# EAGLE board rgb_led_watch (EAGLE 6.5.0)
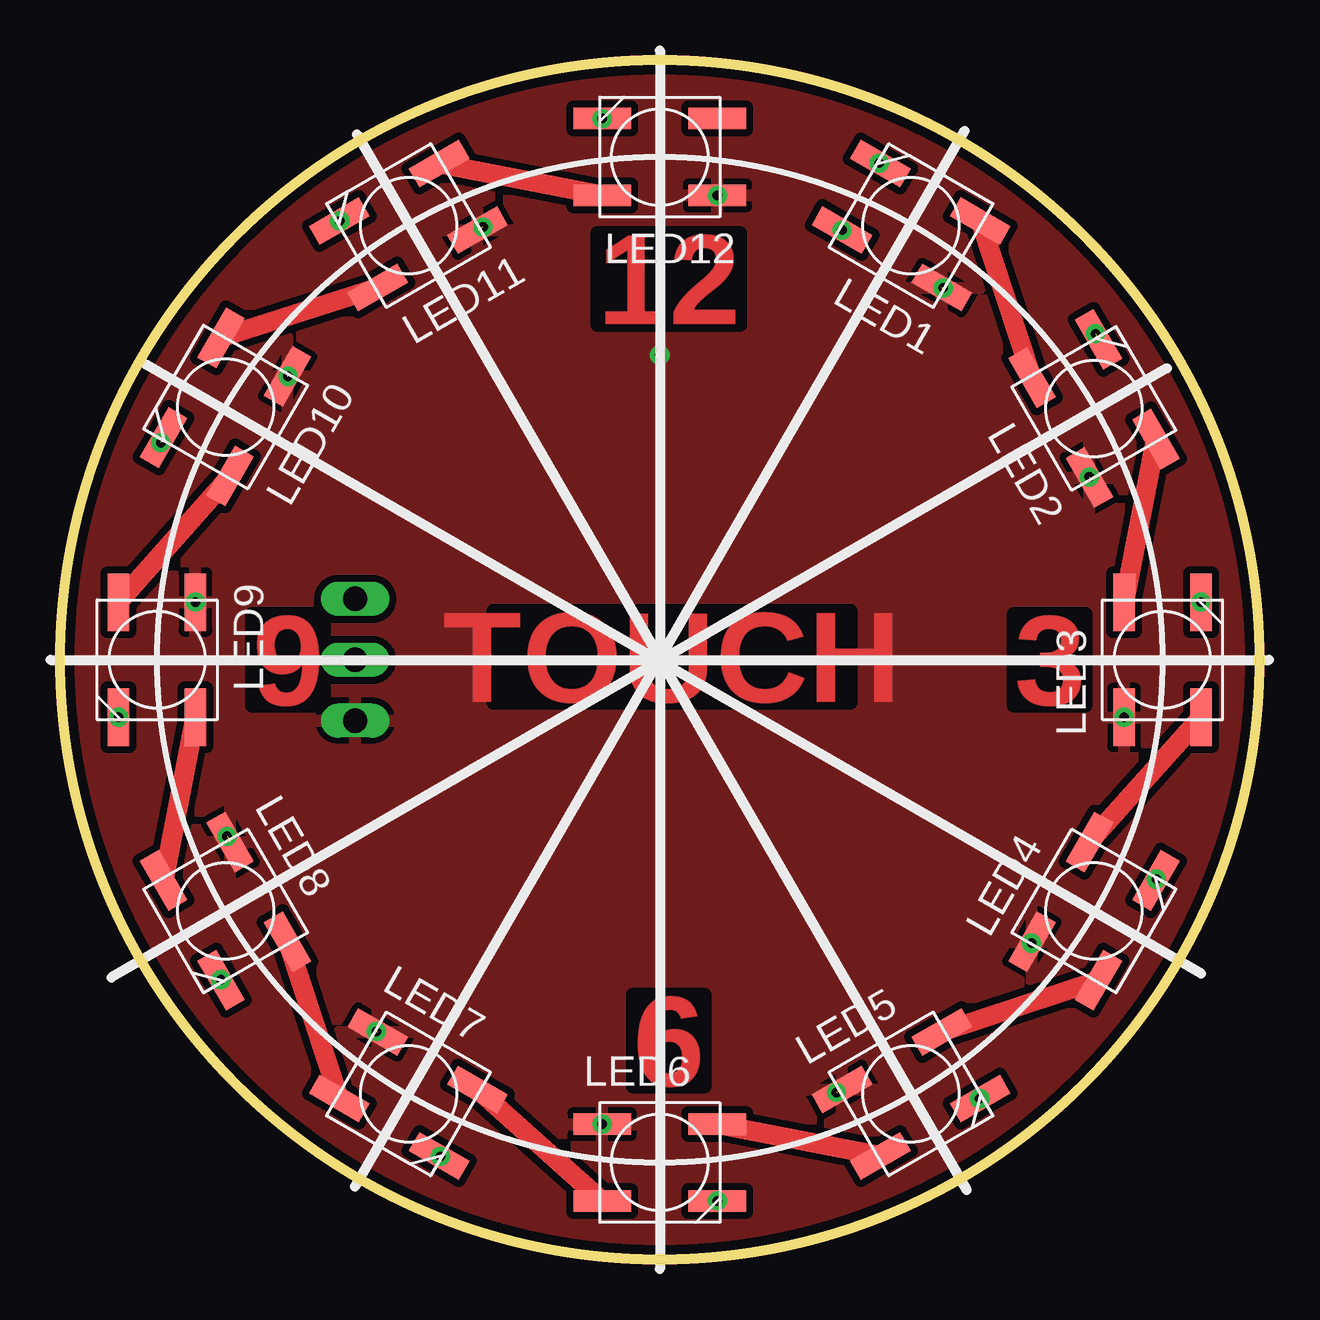
[diagram p0: board, top side]
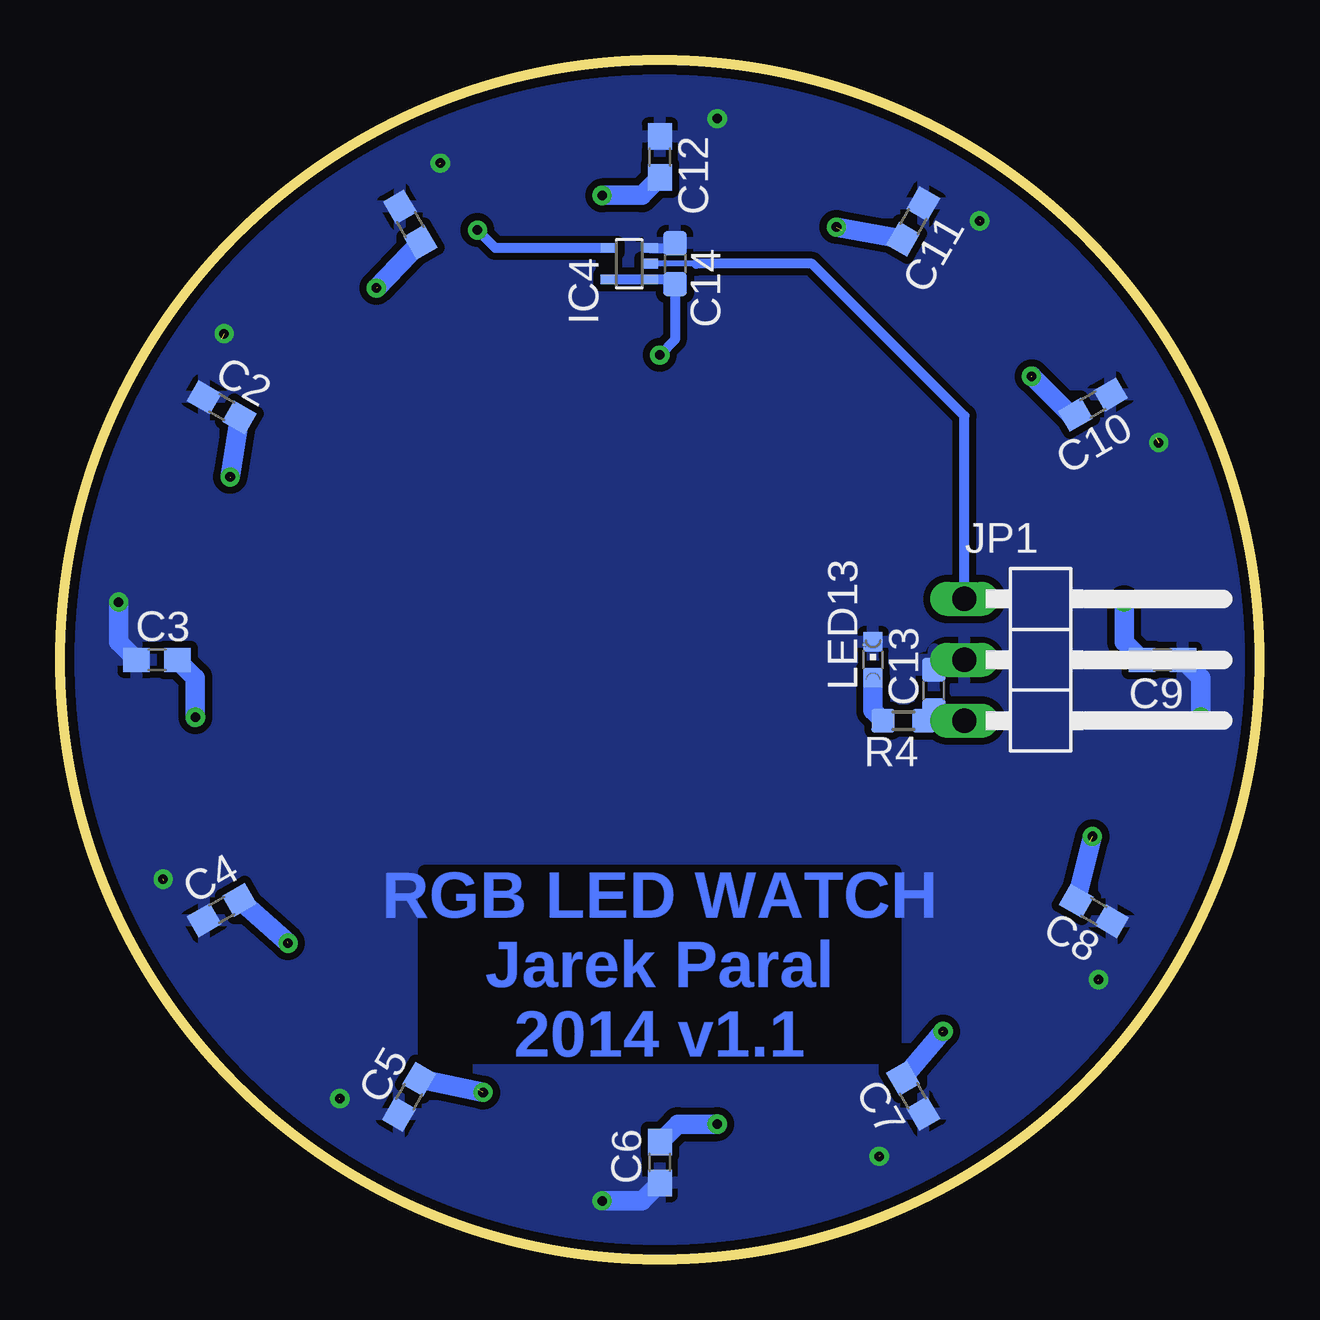
[diagram p1: board, bottom side, seen from below]

Size 50 x 50 mm. Coordinates in mm from the lower left corner, seen from the top.
Outline: circle at 25,25 radius 25
Copper layers (1*16): Top 0.035mm / dielectric 1.5mm / Bottom 0.035mm
Design rules "DRC_Kuba_time_tunel_board_Gatema *": minimum track width 0.2mm, minimum drill 0.4mm, track to track 0.2mm, track to pad 0.2mm, pad to pad 0.2mm, via to via 0.2mm, smd to smd 0mil, copper to edge 0.4mm, drill to drill 0.4mm, minimum pad ring 0.2mm, minimum via ring 0.2mm, stop-mask expansion 2mil, vias tented up to drill 0.3mm, thermal gap 10mil

## Footprints (pad centres in the part's own frame; a part is rotated, then mirrored left to right if it is on the bottom)
C0603 = smd 1.1 x 1: 1 -0.85,0; 2 0.85,0
C0603' = smd 1 x 1: 1 -0.85,0; 2 0.85,0
SC70-5 = smd 0.4 x 0.7: 1 -0.65,-0.85; 2 0,-0.85; 3 0.65,-0.85; 4 0.65,0.85; 5 -0.65,0.85
1X03/90 = drill 1.016 long: 1 -2.54,-3.81; 2 0,-3.81; 3 2.54,-3.81
WS2812B = smd 2.4 x 0.9: DIN 2.4,1.6; DOUT -2.4,-1.6; VDD -2.4,1.6; VSS 2.4,-1.6
CHIPLED_0603 = smd 0.8 x 0.8: A 0,-0.75; C 0,0.75
R0603 = smd 1 x 1: 1 -0.85,0; 2 0.85,0

## Placement (x,y rotation side)
C1  100n  [C0603]  35.4,43.14 300 bottom
C2  100n  [C0603]  43.26,35.52 330 bottom
C3  100n  [C0603]  45.95,25 0 bottom
C4  100n  [C0603]  43.26,14.57 30 bottom
C5  100n  [C0603]  35.45,6.79 60 bottom
C6  100n  [C0603]  25,4.05 90 bottom
C7  100n  [C0603]  14.44,6.82 120 bottom
C8  100n  [C0603]  6.9,14.52 150 bottom
C9  100n  [C0603]  4.05,25 180 bottom
C10  100n  [C0603]  6.95,35.64 210 bottom
C11  100n  [C0603]  14.44,43.27 240 bottom
C12  100n  [C0603]  25,45.95 270 bottom
C13  4u7  [C0603']  13.57,23.73 90 bottom
C14  100n/6,3V  [C0603']  24.37,41.51 270 bottom
IC4  74V1T126CTR  [SC70-5]  26.27,41.51 90 bottom
JP1  [1X03/90]  8.49,25 270 bottom
LED1  WS2812B  [WS2812B]  35.48,43.1 150 top
LED2  WS2812B  [WS2812B]  43.1,35.48 120 top
LED3  WS2812B  [WS2812B]  45.95,25 90 top
LED4  WS2812B  [WS2812B]  43.1,14.52 60 top
LED5  WS2812B  [WS2812B]  35.48,6.9 30 top
LED6  WS2812B  [WS2812B]  25,4.05 0 top
LED7  WS2812B  [WS2812B]  14.52,6.9 330 top
LED8  WS2812B  [WS2812B]  6.9,14.52 300 top
LED9  WS2812B  [WS2812B]  4.05,25 270 top
LED10  WS2812B  [WS2812B]  6.9,35.54 240 top
LED11  WS2812B  [WS2812B]  14.52,43.1 210 top
LED12  WS2812B  [WS2812B]  25,45.95 180 top
LED13  GREEN  [CHIPLED_0603]  16.11,25 0 bottom
R4  1k  [R0603]  14.84,22.46 180 bottom

## Library data of the parts
C1-C12 = resistor
C13 C14 R4 = rcl_upravena
IC4 = 74xx-little-de
JP1 = pinhead
LED1-LED12 = rgb_led
LED13 = led

## Nets
+5V: C1.2 C2.2 C3.2 C4.2 C5.2 C6.2 C7.2 C8.2 C9.2 C10.2 C11.2 C12.2 C13.1 C14.2 IC4.1 IC4.5 JP1.3 LED1.VDD LED2.VDD LED3.VDD LED4.VDD LED5.VDD LED6.VDD LED7.VDD LED8.VDD LED9.VDD LED10.VDD LED11.VDD LED12.VDD R4.1
GND: C1.1 C2.1 C3.1 C4.1 C5.1 C6.1 C7.1 C8.1 C9.1 C10.1 C11.1 C12.1 C13.2 C14.1 IC4.3 JP1.2 LED1.VSS LED2.VSS LED3.VSS LED4.VSS LED5.VSS LED6.VSS LED7.VSS LED8.VSS LED9.VSS LED10.VSS LED11.VSS LED12.VSS LED13.C
LED1: LED6.DOUT LED7.DIN
LED2: LED9.DOUT LED10.DIN
LED3: LED3.DOUT LED4.DIN
N$2: LED13.A R4.2
N$3: LED1.DOUT LED2.DIN
N$4: LED4.DOUT LED5.DIN
N$5: LED2.DOUT LED3.DIN
N$6: LED5.DOUT LED6.DIN
N$7: LED7.DOUT LED8.DIN
N$8: LED8.DOUT LED9.DIN
N$9: LED10.DOUT LED11.DIN
N$10: LED11.DOUT LED12.DIN
SIG_IN: IC4.2 JP1.1
SIG_OUT: IC4.4 LED1.DIN

## Tracks (layer width: path | path; a pad name or v marks a point on that pad's centre or on a via)
+5V  (via drill 0.4)  (9 unrouted)
  Bottom 0.406: C14.2 24.57,40.86 IC4.1 IC4.5 24.37,40.86 | 24.37,40.86 24.35,40.86 | 24.37,40.86 24.37,38.34 v25,37.7
  Bottom 0.813: C3.2 44.36,24.25 LED3.VDD | C6.2 24.25,5.65 LED6.VDD | C9.2 5.65,25.75 LED9.VDD | C12.2 25.75,44.36 LED12.VDD | C10.2 7.88,35.21 LED10.VDD | C11.2 v17.63,43.03 | C1.2 v36.81,40.49 | C2.2 v42.91,32.62 | C4.2 v40.49,13.19 | C5.2 v32.37,6.97 | C7.2 v13.19,9.51 | C8.2 v6.97,17.63 | JP1.3 R4.1 C13.1
  other vias: 44.36,22.6 22.6,5.65 5.65,27.4 27.4,44.36 9.51,36.81
  pour Top (isolate 0.3): 25,50.4 -0.4,50.4 -0.4,4.05 -0.4,-0.4 47.23,-0.4 50.4,-0.4 50.4,47.86 50.4,50.4
GND  (via drill 0.4)  (8 unrouted)
  Bottom 0.406: IC4.3 24.57,42.16 C14.1
  Bottom 0.813: C3.1 47.56,25.75 v47.56,27.4 | C6.1 25.75,2.45 v27.4,2.45 | C9.1 2.45,24.25 v2.45,22.6 | C13.2 13.15,25 JP1.2
  other vias: 22.6,47.56 4.2,34.05 11.67,43.29 34.14,45.7 43.16,38.59 45.7,15.86 38.34,6.71 15.86,4.3 6.71,11.67
  pour Bottom (isolate 0.3): 25,50.4 -0.4,50.4 -0.4,-0.4 50.4,-0.4 50.4,50.4
LED1
  Top 0.813: LED6.DOUT LED7.DIN
LED2
  Top 0.813: LED9.DOUT LED10.DIN
LED3
  Top 0.813: LED3.DOUT LED4.DIN
N$2
  Bottom 0.813: LED13.A 16.11,22.88 R4.2
N$3
  Top 0.813: LED1.DOUT LED2.DIN
N$4
  Top 0.813: LED4.DOUT LED5.DIN
N$5
  Top 0.813: LED2.DOUT LED3.DIN
N$6
  Top 0.813: LED5.DOUT LED6.DIN
N$7
  Top 0.813: LED7.DOUT LED8.DIN
N$8
  Top 0.813: LED8.DOUT LED9.DIN
N$9
  Top 0.813: LED10.DOUT LED11.DIN
N$10
  Top 0.813: LED11.DOUT LED12.DIN
SIG_IN
  Bottom 0.254: 23.48,41.51 IC4.2
  Bottom 0.406: JP1.1 12.3,35.16 18.65,41.51 23.48,41.51
SIG_OUT  (via drill 0.4)
  Bottom 0.406: IC4.4 31.85,42.16 LED1.DIN
  other vias: 32.6,42.91

## Text on the board
Top: 12 | 9 | TOUCH | 3 | 6
Bottom: RGB LED WATCH / Jarek Paral / 2014 v1.1